# Altium PCB HDMI_Extension_Project.PcbDoc
Units mm, origin at the board's own origin, x right, y up, seen from the top; angles counter-clockwise.
Board outline 90.3 x 85.47 mm, 2 copper layers (Top Layer, Bottom Layer); 61 components, 71 nets, 283 pads, 95 vias.
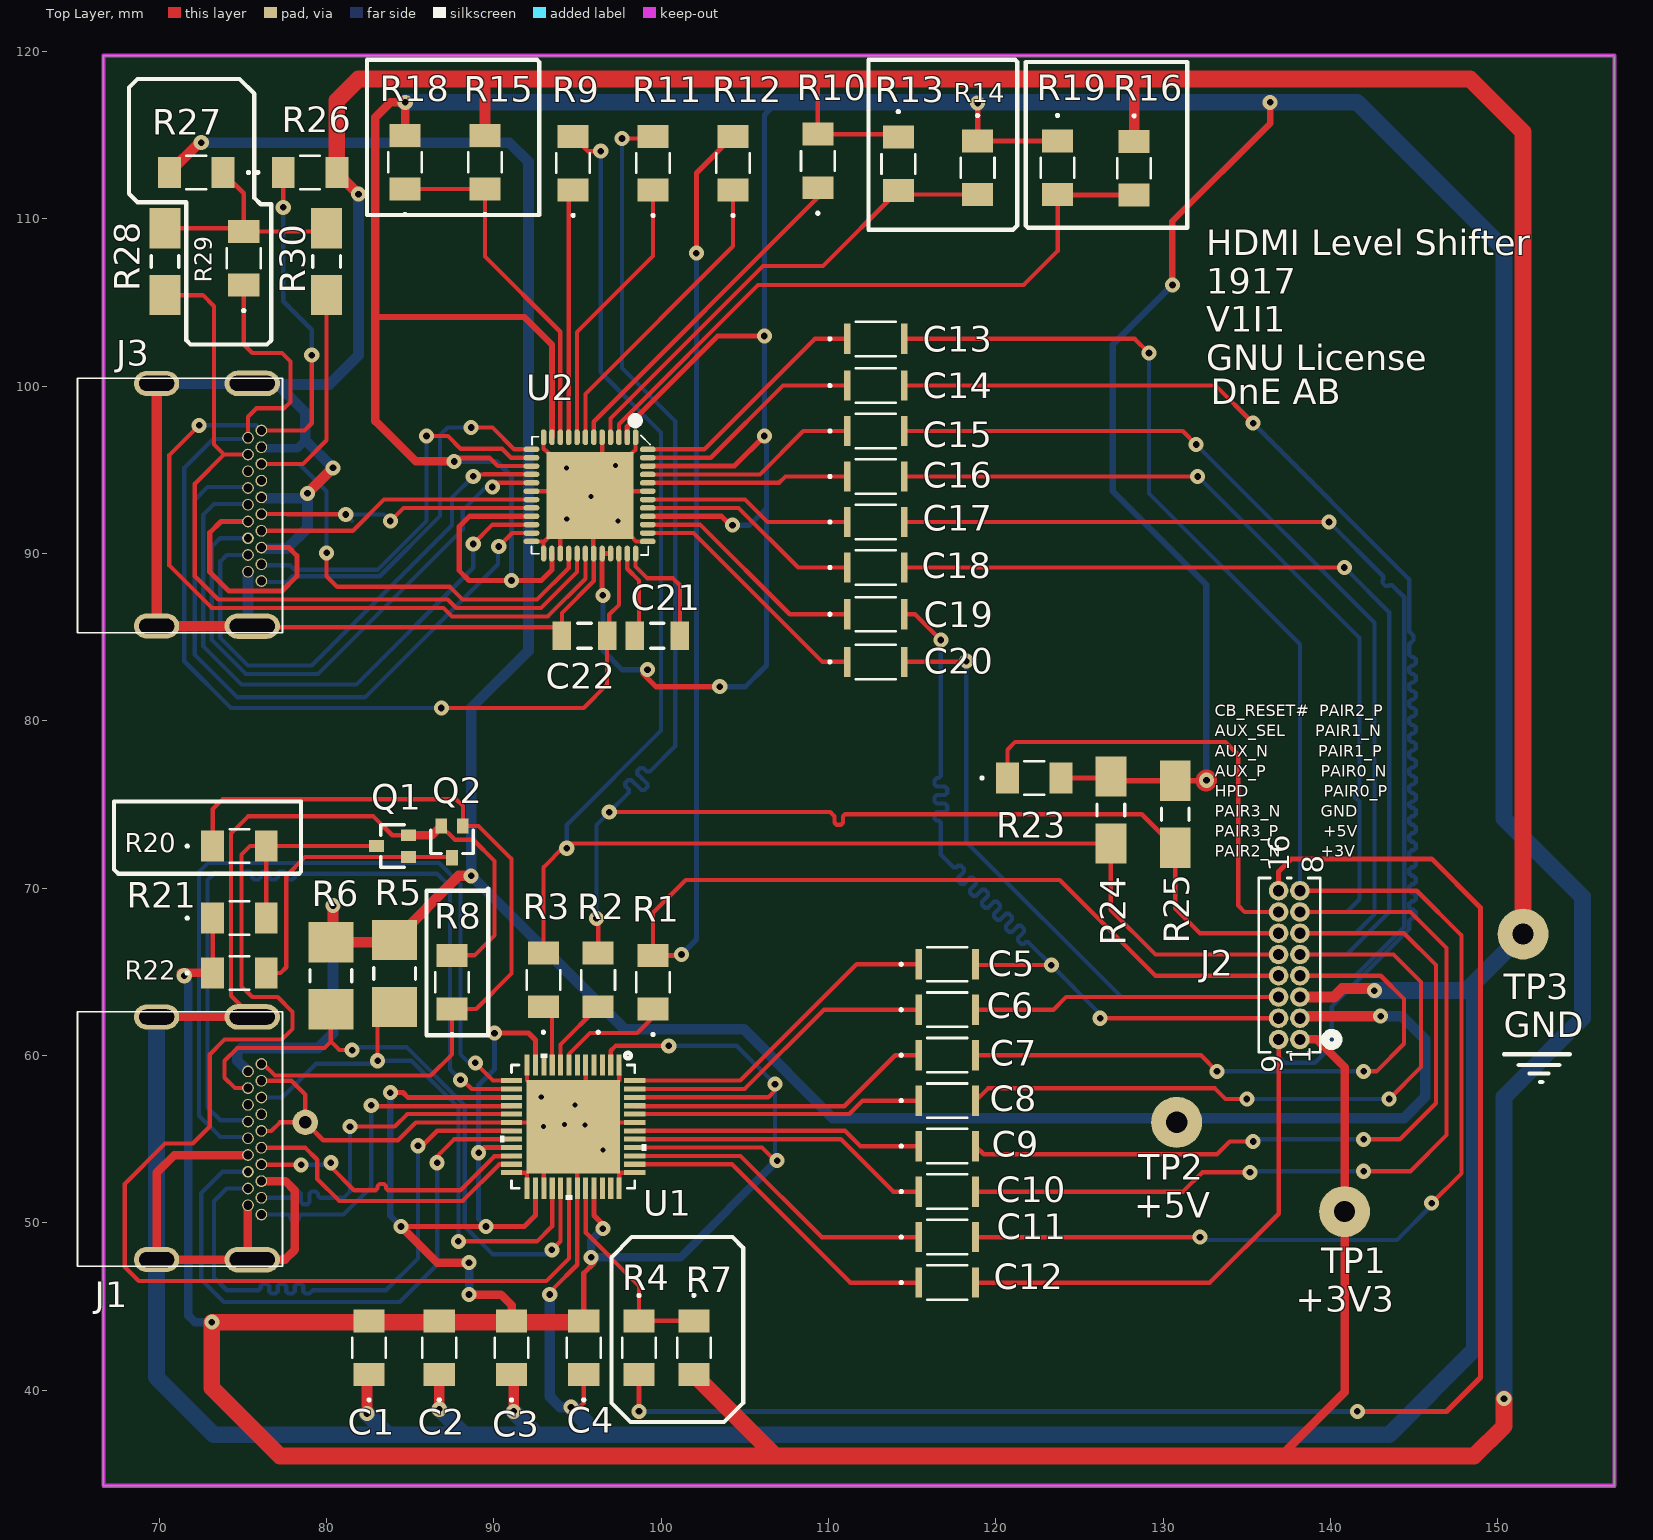
[diagram p0: Top Layer view]
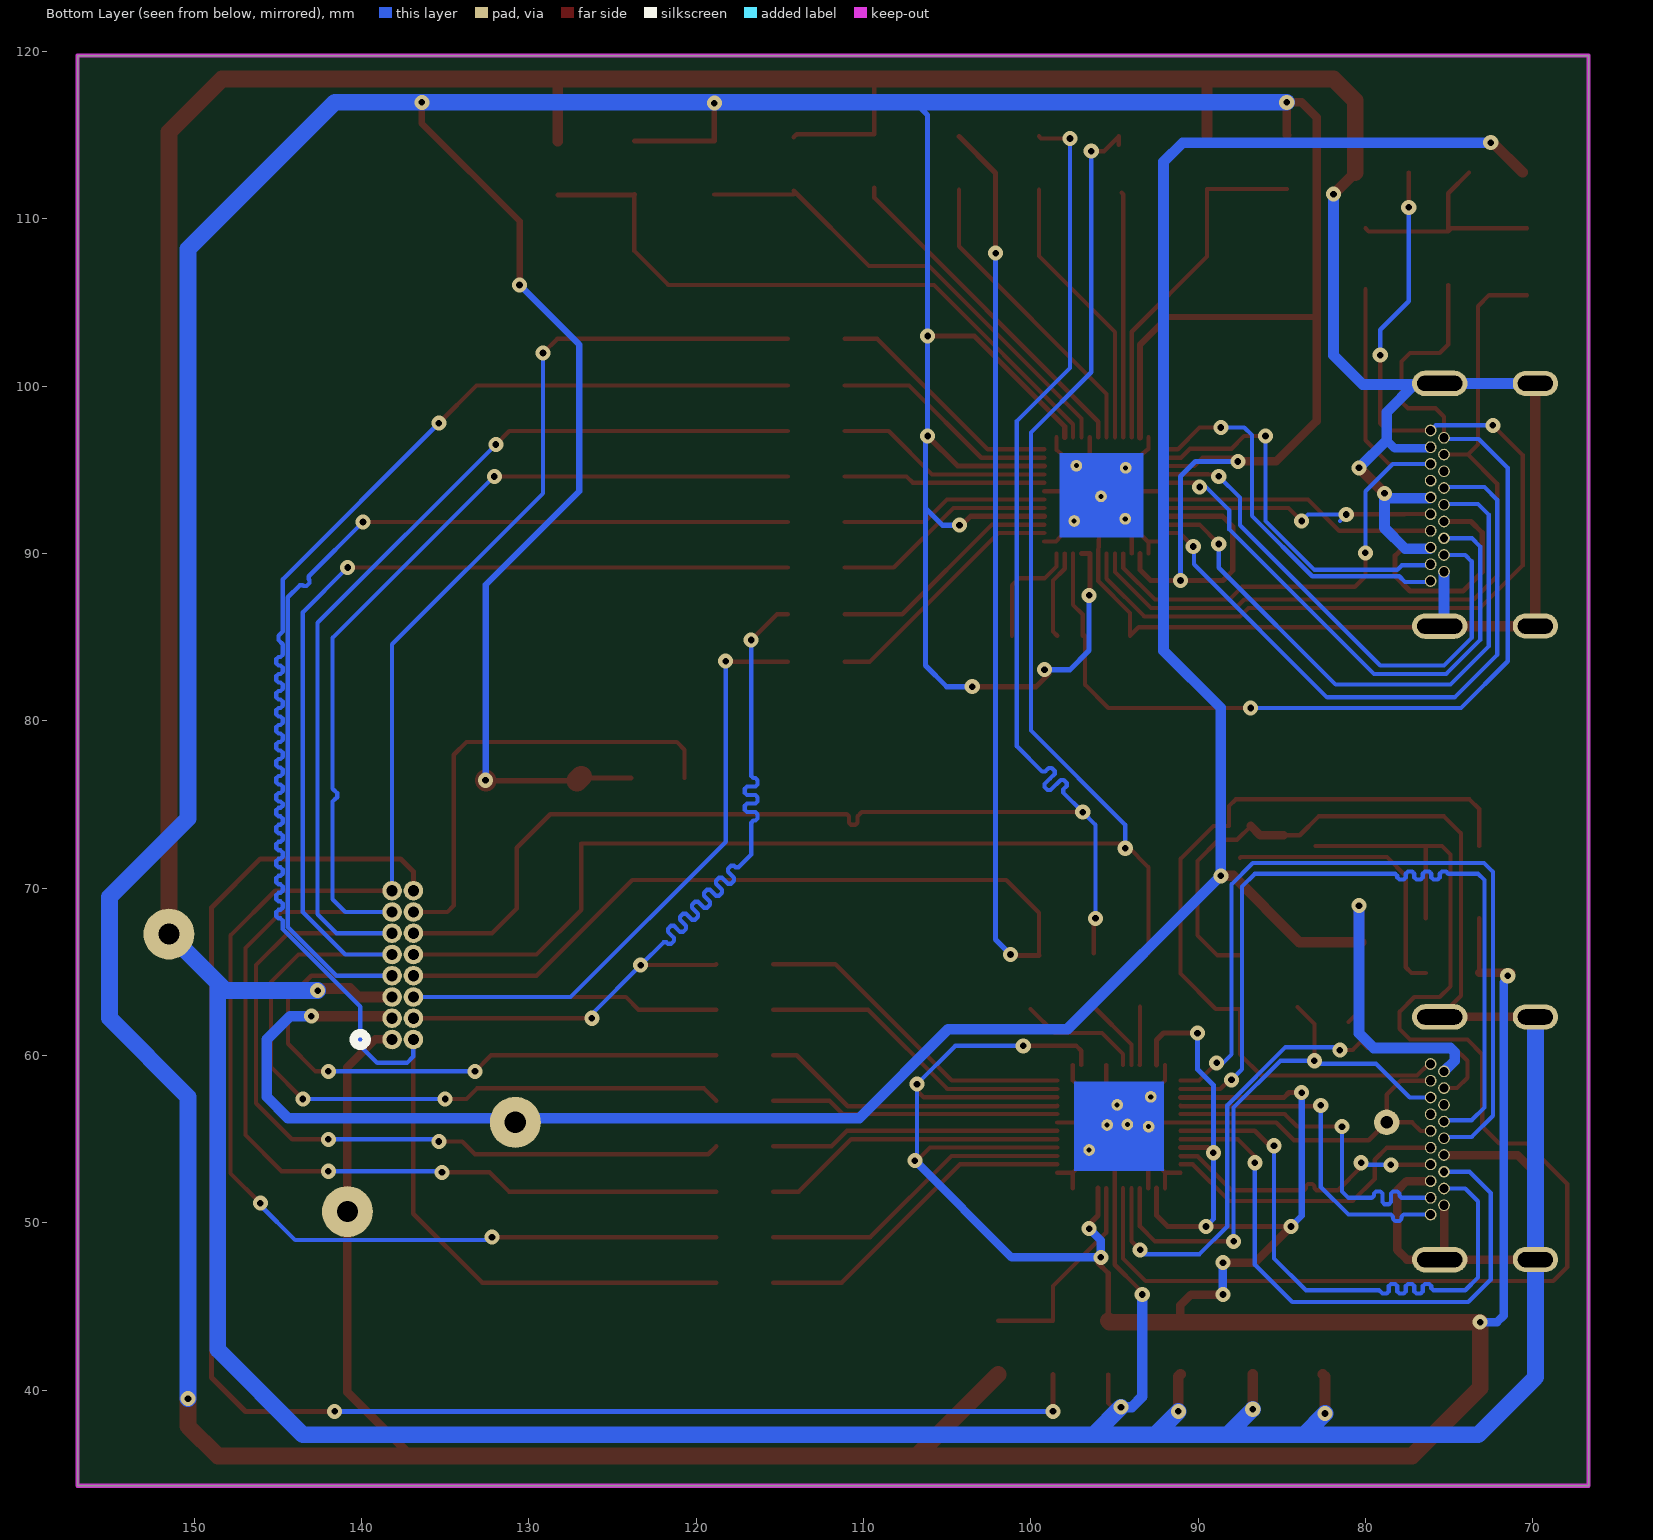
[diagram p1: Bottom Layer view, seen from below]
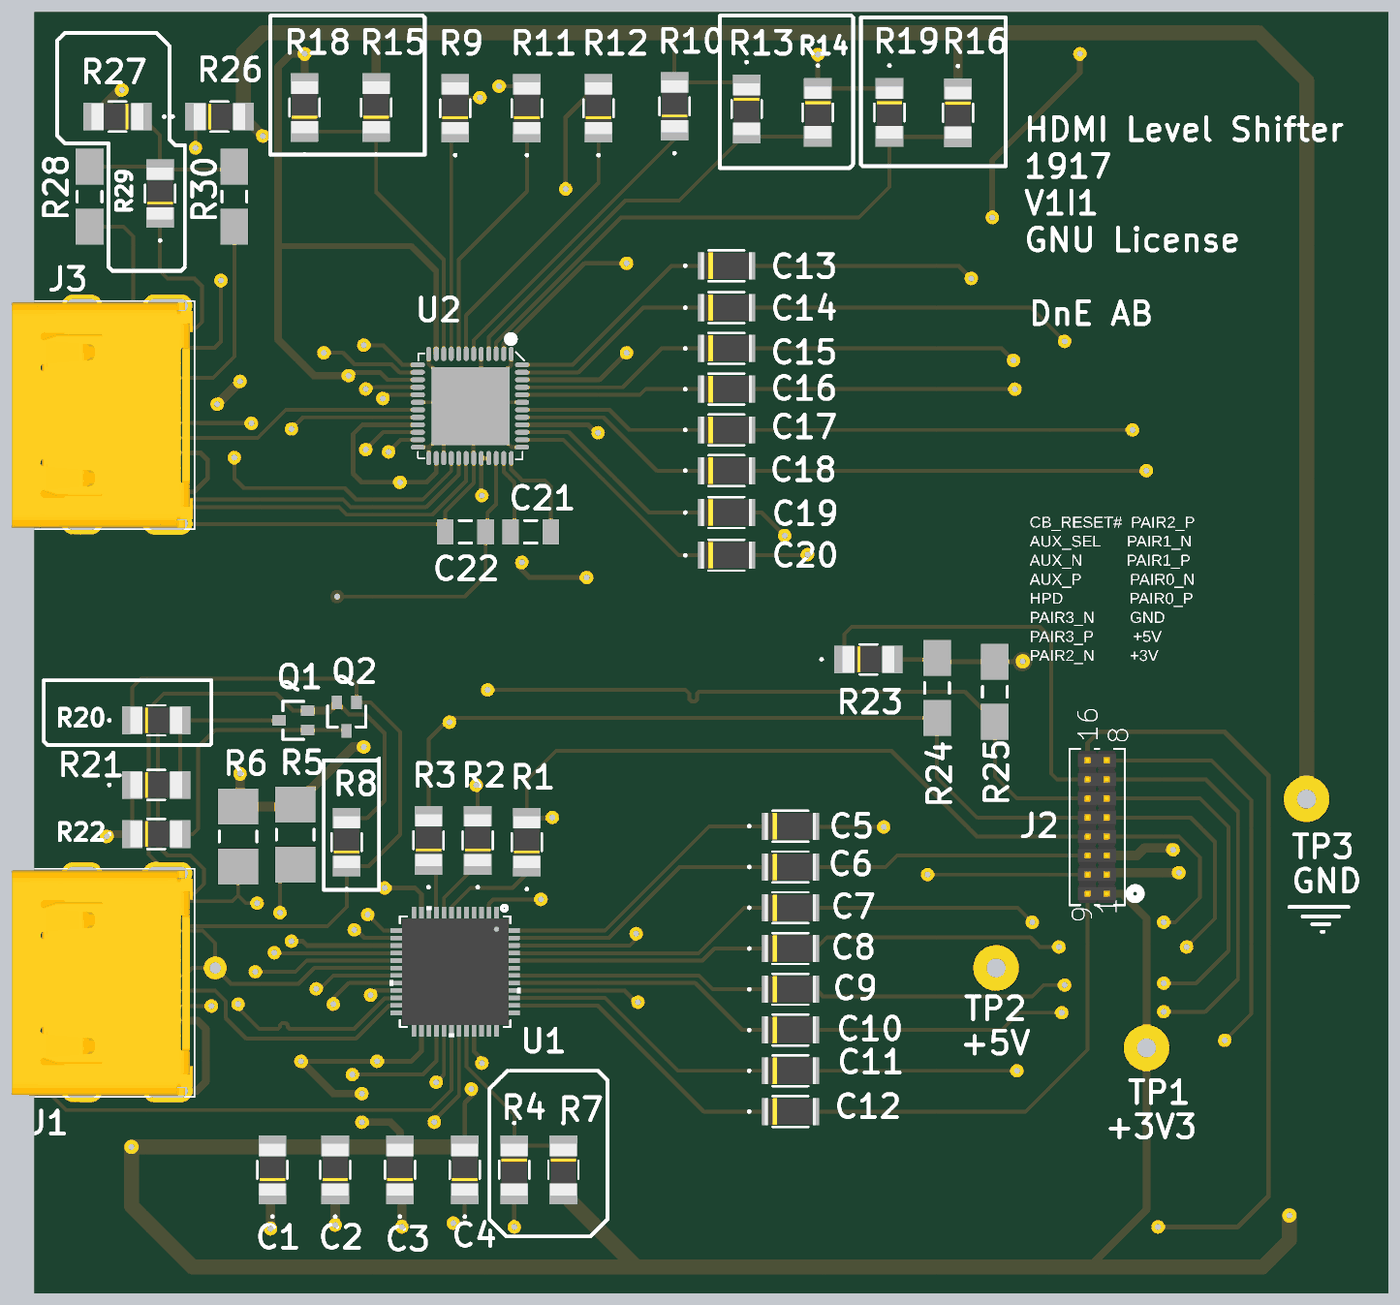
[diagram p2: 3D render of the assembled board from above, using the file's embedded part models]

## Layer stack, top to bottom
Top Solder: solder mask 0.0102, Solder Resist, Dk 3.5
Top Layer: signal copper 0.0356
Dielectric 1: dielectric 0.32, FR-4, Dk 4.8
Bottom Layer: signal copper 0.0356
Bottom Solder: solder mask 0.0102, Solder Resist, Dk 3.5

## Board outline
66.675,34.29 66.675,119.761 156.972,119.761 156.972,34.29

## Design rules (kind name [scope] priority, off if disabled: settings)
Clearance [All] p1: gap=0.051 ignorepadtopadclearanceinfootprint=FALSE
DiffPairsRouting DiffPair_85DiffPairsRouting [InDifferentialPairClass('HDMI')] p1: maxlimit=0.381 minlimit=0.254 mostfreqgap=0.254 toplayer_minwidth=0.254 toplayer_maxwidth=0.381 toplayer_prefwidth=0.254 bottomlayer_minwidth=0.254 bottomlayer_maxwidth=0.381 bottomlayer_prefwidth=0.254 maxuncoupledlength=12.7
DiffPairsRouting DiffPair_DiffPairsRouting [InDifferentialPair ('TMDS_D2')] p2: maxlimit=0.508 minlimit=0.254 mostfreqgap=0.381 toplayer_minwidth=0.254 toplayer_maxwidth=0.381 toplayer_prefwidth=0.381 bottomlayer_minwidth=0.254 bottomlayer_maxwidth=0.381 bottomlayer_prefwidth=0.381 maxuncoupledlength=12.7
DiffPairsRouting [All] p3: maxlimit=0.254 minlimit=0.254 mostfreqgap=0.254 toplayer_minwidth=0.381 toplayer_maxwidth=0.381 toplayer_prefwidth=0.381 bottomlayer_minwidth=0.381 bottomlayer_maxwidth=0.381 bottomlayer_prefwidth=0.381 maxuncoupledlength=12.7
HoleSize [All] p1: absolutevalues=TRUE maxlimit=3.81 minlimit=0.025 maxpercent=80.000 minpercent=20.000
HoleToHoleClearance [All] p1: gap=0.025 allowstackedmicrovias=TRUE
MatchedLengths DiffPair_85MatchedLengths [InDifferentialPairClass('HDMI')] p1: tolerance=0.127 checknetsindiffpair=TRUE checkdiffpairvsdiffpair=FALSE checkxsignals=FALSE checkothers=FALSE
MinimumSolderMaskSliver [All] p1: minsoldermaskwidth=0.025
PolygonConnect [All] p1: connectstyle=Relief reliefconductorwidth=0.254 reliefentries=4 polygonreliefangle="90 Angle" airgapwidth=0.254
RoutingVias [All] p1: holewidth=0.4 width=0.9 viastyle="Through Hole" minholewidth=0.3 minwidth=0.7 maxholewidth=1 maxwidth=2
SilkToSilkClearance [All] p1: silktosilkclearance=0.025
SilkToSolderMaskClearance [IsPad] p1: minsilkscreentomaskgap=0 clearancetoexposedcopper=TRUE
SolderMaskExpansion [All] p1: expansion=0.025
Width [All] p1: maxlimit=1.27 minlimit=0.254 preferedwidth=0.254
24 further rules are at their usual default settings.

## Classes and differential pairs
net class DIFF_85: DDI0_AUX_N DDI0_AUX_P DDI0_PAIR0_N DDI0_PAIR0_P DDI0_PAIR1_N DDI0_PAIR1_P DDI0_PAIR2_N DDI0_PAIR2_P DDI0_PAIR3_N DDI0_PAIR3_P TMDS_CLK_N TMDS_CLK_P TMDS_D0_N TMDS_D0_P TMDS_D1_N TMDS_D1_P TMDS_D2_N TMDS_D2_P
differential pair class HDMI: DDI0_AUX DDI0_PAIR0 DDI0_PAIR1 DDI0_PAIR2 DDI0_PAIR3 TMDS_CLK TMDS_D0 TMDS_D1 TMDS_D2
differential pair TMDS_D2: +TMDS_D2_P -TMDS_D2_N
differential pair TMDS_D1: +TMDS_D1_P -TMDS_D1_N
differential pair TMDS_CLK: +TMDS_CLK_P -TMDS_CLK_N
differential pair TMDS_D0: +TMDS_D0_P -TMDS_D0_N
differential pair DDI0_AUX: +DDI0_AUX_P -DDI0_AUX_N
differential pair DDI0_PAIR0: +DDI0_PAIR0_P -DDI0_PAIR0_N
differential pair DDI0_PAIR1: +DDI0_PAIR1_P -DDI0_PAIR1_N
differential pair DDI0_PAIR2: +DDI0_PAIR2_P -DDI0_PAIR2_N
differential pair DDI0_PAIR3: +DDI0_PAIR3_P -DDI0_PAIR3_N

## Components (designator, comment, footprint, x,y, rotation, side; value= is the part's Value field where it differs from the comment)
C1 "100nF" STA_RMCF1206-M 82.55,42.545 r90 top
C2 "100nF" STA_RMCF1206-M 86.741,42.545 r90 top
C3 "100nF" STA_RMCF1206-M 91.059,42.545 r90 top
C4 "100nF" STA_RMCF1206-M 95.377,42.545 r90 top
C5 "0.1uF" CAP_3216 117.094,65.456 r0 top value=Value
C6 "0.1uF" CAP_3216 117.094,62.738 r0 top value=Value
C7 "0.1uF" CAP_3216 117.094,60.02 r0 top value=Value
C8 "0.1uF" CAP_3216 117.094,57.302 r0 top value=Value
C9 "0.1uF" CAP_3216 117.094,54.584 r0 top value=Value
C10 "0.1uF" CAP_3216 117.094,51.866 r0 top value=Value
C11 "0.1uF" CAP_3216 117.094,49.148 r0 top value=Value
C12 "0.1uF" CAP_3216 117.094,46.43 r0 top value=Value
C13 "0.1uF" CAP_3216 112.827,102.832 r0 top value=Value
C14 "0.1uF" CAP_3216 112.827,100.039 r0 top value=Value
C15 "0.1uF" CAP_3216 112.827,97.321 r0 top value=Value
C16 "0.1uF" CAP_3216 112.827,94.603 r0 top value=Value
C17 "0.1uF" CAP_3216 112.827,91.885 r0 top value=Value
C18 "0.1uF" CAP_3216 112.827,89.167 r0 top value=Value
C19 "0.1uF" CAP_3216 112.827,86.373 r0 top value=Value
C20 "0.1uF" CAP_3216 112.827,83.528 r0 top value=Value
C21 "1000pF" C1206 99.775,85.09 r180 top
C22 "10u" C1206 95.421,85.09 r180 top value=10µF
J1 "HDMI Connector" HDMI_Thru 75.311,55.055 r270 top
J2 "Part Number: FTS-108-01-F-D" CON16_2x8_TU_FTS 136.906,69.85 r90 top value=Value
J3 "HDMI Connector" HDMI_Thru 75.311,92.916 r270 top
Q1 "2N7002BKW,115" SC70_SOT323 83.947,72.517 r180 top
Q2 "2N7002BKW,115" SC70_SOT323 87.503,72.771 r270 top
R1 "0R0" STA_RMCF1206-M 99.518,64.389 r90 top value=Value
R2 "0R0" STA_RMCF1206-M 96.241,64.516 r90 top value=Value
R3 "0R0" STA_RMCF1206-M 92.964,64.516 r90 top value=Value
R4 "0R0" STA_RMCF1206-M 98.679,42.545 r270 top value=Value
R5 "2K2" R1210 84.074,64.897 r270 top
R6 "2K2" R1210 80.264,64.77 r270 top
R7 "0R0" STA_RMCF1206-M 101.956,42.545 r270 top value=Value
R8 "100K" STA_RMCF1206-M 87.503,64.389 r90 top
R9 "0R0" STA_RMCF1206-M 94.742,113.335 r90 top value=Value
R10 "20K" STA_RMCF1206-M 109.363,113.462 r90 top
R11 "0R0" STA_RMCF1206-M 99.52,113.335 r90 top value=Value
R12 "0R0" STA_RMCF1206-M 104.299,113.335 r90 top value=Value
R13 "0R0" STA_RMCF1206-M 114.173,113.284 r270 top value=Value
R14 "0R0" STA_RMCF1206-M 118.92,113.055 r270 top value=Value
R15 "0R0" STA_RMCF1206-M 89.471,113.385 r90 top value=Value
R16 "0R0" STA_RMCF1206-M 128.27,113.03 r270 top value=Value
R18 "0R0" STA_RMCF1206-M 84.693,113.385 r90 top value=Value
R19 "0R0" STA_RMCF1206-M 123.698,113.055 r270 top value=Value
R20 "0R0" STA_RMCF1206-M 74.803,72.517 r0 top value=Value
R21 "4K7" STA_RMCF1206-M 74.803,68.211 r0 top value=Value
R22 "4K7" STA_RMCF1206-M 74.803,64.934 r0 top value=Value
R23 "100K" STA_RMCF1206-M 122.297,76.581 r0 top
R24 "2K2" R1206 126.873,74.676 r270 top
R25 "2K2" R1206 130.725,74.422 r270 top
R26 "100K" STA_RMCF1206-M 79.02,112.776 r0 top
R27 "0R0" STA_RMCF1206-M 72.212,112.776 r180 top value=Value
R28 "2K2" R1206 70.358,107.442 r270 top
R29 "0R0" STA_RMCF1206-M 75.057,107.645 r90 top value=Value
R30 "2K2" R1206 80.01,107.442 r270 top
TP1 "TP_25MILC" TP_25C 140.843,50.723 r0 top
TP2 "TP_25MILC" TP_25C 130.81,56.057 r0 top
TP3 "TP_25MILC" TP_25C 151.511,67.31 r0 top
U1 "MAX9406ETM+" 21-0144H_T4877-6 94.742,55.753 r270 top
U2 "Interface - Specialized ENHNCD PERFORMANCE HDMI/DVI SHFTR V-REG" HVQFN48 98.476,96.952 r270 top

## Footprints (in the part's own frame and the unit in brackets; to place one, negate y for a bottom-side part, rotate by r counter-clockwise, add the part's x,y. Pads: shape width x height; smd on the part's side, far side on the other; paste and mask are expansions set on the pad)
21-0144H_T4877-6 [mil]
  rect 50x12 smd paste+0 mask+0: 1(-145,108.27) 2(-145,88.58) 3(-145,68.9) 4(-145,49.21) 5(-145,29.53) 6(-145,9.84) 7(-145,-9.84) 8(-145,-29.53) 9(-145,-49.21) 10(-145,-68.9) 11(-145,-88.58) 12(-145,-108.27) 25(145,-108.27) 26(145,-88.58) 27(145,-68.9) 28(145,-49.21) 29(145,-29.53) 30(145,-9.84) 31(145,9.84) 32(145,29.53) 33(145,49.21) 34(145,68.9) 35(145,88.58) 36(145,108.27)
  rect 12x50 smd paste+0 mask+0: 13(-108.27,-145) 14(-88.58,-145) 15(-68.9,-145) 16(-49.21,-145) 17(-29.53,-145) 18(-9.84,-145) 19(9.84,-145) 20(29.53,-145) 21(49.21,-145) 22(68.9,-145) 23(88.58,-145) 24(108.27,-145) 37(108.27,145) 38(88.58,145) 39(68.9,145) 40(49.21,145) 41(29.53,145) 42(9.84,145) 43(-9.84,145) 44(-29.53,145) 45(-49.21,145) 46(-68.9,145) 47(-88.58,145) 48(-108.27,145)
  rect 220x220 smd paste-109.5 mask+0: 49(0,0)
  silkscreen extent -174,-172 172,172, body extent -140,-140 140,140, height 32
C1206 [mm] "Chip Capacitor, Body 3.2x1.6mm, IPC High Density"
  rect 1.1x1.7 smd: 1(-1.35,0) 2(1.35,0)
  silkscreen extent -0.4,-0.75 0.4,0.75, body extent -1.7,-0.9 1.7,0.9, height 1.3
CAP_3216 [mil]
  rect 16x71 smd paste+0 mask+0: 1(-67,0) 2(67,0)
  silkscreen extent -111,-40 47,40, body extent -67,-36 67,36, height 49
CON16_2x8_TU_FTS [mil]
  round 46 hole 26: 1(-350,-50) 2(-300,-50) 3(-250,-50) 4(-200,-50) 5(-150,-50) 6(-100,-50) 7(-50,-50) 8(0,-50) 9(-350,0) 10(-300,0) 11(-250,0) 12(-200,0) 13(-150,0) 14(-100,0) 15(-50,0) 16(0,0)
  silkscreen extent -380,-140 30,47, body extent -375,-75 25,25, height 154
HDMI_Thru [mm]
  round 0.7 hole 0.55: 1(4.559,0.8) 2(4,0) 3(3.559,0.8) 4(3,0) 5(2.559,0.8) 7(1.559,0.8) 8(1,0) 9(0.559,0.8) 10(0,0) 11(-0.441,0.8) 12(-1,0) 13(-1.441,0.8) 14(-2,0) 15(-2.441,0.8) 16(-3,0) 17(-3.441,0.8) 18(-4,0) 19(-4.441,0.8)
  round 0.7 hole 0.5: 6(2,0)
  oval 1.524x3.302 hole 0.9 slot 2.7 at 90 deg: H1(7.25,0.254) H2(-7.25,0.254)
  oval 1.5x2.7 hole 0.9 slot 2.1 at 90 deg: H3(7.25,-5.461) H4(-7.25,-5.461)
  silkscreen extent -7.57,-10.19 7.65,2.06, body extent -7.45,-10.12 7.55,1.93, height 6.08
HVQFN48 [mm]
  oval 0.95x0.33 smd: 1(0,0) 2(0,-0.5) 3(0,-1) 4(0,-1.5) 5(0,-2) 6(0,-2.5) 7(0,-3) 8(0,-3.5) 9(0,-4) 10(0,-4.5) 11(0,-5) 12(0,-5.5) 25(6.95,-5.5) 26(6.95,-5) 27(6.95,-4.5) 28(6.95,-4) 29(6.95,-3.5) 30(6.95,-3) 31(6.95,-2.5) 32(6.95,-2) 33(6.95,-1.5) 34(6.95,-1) 35(6.95,-0.5) 36(6.95,0)
  oval 0.33x0.95 smd: 13(0.725,-6.225) 14(1.225,-6.225) 15(1.725,-6.225) 16(2.225,-6.225) 17(2.725,-6.225) 18(3.225,-6.225) 19(3.725,-6.225) 20(4.225,-6.225) 21(4.725,-6.225) 22(5.225,-6.225) 23(5.725,-6.225) 24(6.225,-6.225) 37(6.225,0.725) 38(5.725,0.725) 39(5.225,0.725) 40(4.725,0.725) 41(4.225,0.725) 42(3.725,0.725) 43(3.225,0.725) 44(2.725,0.725) 45(2.225,0.725) 46(1.725,0.725) 47(1.225,0.725) 48(0.725,0.725)
  rect 5.2x5.2 smd: 49(3.48,-2.718)
  silkscreen extent -1.2,-6.22 7.04,0.86, body extent 0,-6.22 6.96,0.76, height 0.85
R1206 [mm]
  rect 2.4x1.85 smd: 1(-2,0) 2(2,0)
  silkscreen extent -0.35,-0.82 0.35,0.82, body extent -1.75,-0.91 1.75,0.91, height 0.7
R1210 [mm]
  rect 2.4x2.7 smd: 1(-2,0) 2(2,0)
  silkscreen extent -0.35,-1.25 0.35,1.25, body extent -1.75,-1.33 1.75,1.32, height 0.7
SC70_SOT323 [mm]
  rect 0.9x0.7 smd: 1(-0.95,0.65) 2(-0.95,-0.65) 3(0.95,0)
  silkscreen extent -0.7,-1.27 0.7,1.27, body extent -1.27,-1.27 1.27,1.27, height 1.1
STA_RMCF1206-M [mil]
  rect 54x73 smd paste+0 mask+0: 1(-63,0) 2(63,0)
  silkscreen extent -126,-40 23,40, body extent -68,-34 68,34, height 28
TP_25C [mil]
  round 120 hole 50 paste-25 mask+2: 1(0,-1.97)

## Part data
C1 C2 C3 C4: library part CL05A104KA5NNNC, "CAP CER 0.1UF 50V X8R 0603", Manufacturer 1="Samsung Electro-Mechanics", Operating Temperature="-55°C ~ 85°C", Package / Case="0402 (1005 Metric)", Ratings=-, Supplier Part Number 1=1276-1043-6-ND, Temperature Coefficient=X5R, Tolerance=±10%, Voltage - Rated=25V, Applications="General Purpose", Category=Capacitors, ComponentLink1Description=http://www.samsungsem.com/kr/support/product-search/mlcc/CL05A104KA5NNNC.jsp, ComponentLink1URL=http://www.samsungsem.com/kr/support/product-search/mlcc/CL05A104KA5NNNC.jsp, Description 1="CAP CER 0.1UF 25V X5R 0402", Features=-, Height - Seated (Max)=-, Lead Spacing=-, Lead Style=-, Manufacturer Part Number 1=CL05A104KA5NNNC, Mounting Type="Surface Mount, MLCC", Notification="Current market demand for these product types have resulted in fluctuating and extending lead times. Lead times may differ.", Packaging=Digi-Reel®, Part Status=Active, Pricing 1="1=0.1, 10=0.04, 100=0.0176, 500=0.0126, 1000=0.0099, 2500=0.009, 5000=0.00828 (USD)", RoHS="RoHS Compliant", Size / Dimension="0.039\" L x 0.020\" W (1.00mm x 0.50mm)", Stock 1=100000, Supplier 1=Digi-Key, Thickness (Max)="0.022\" (0.55mm)"
C5 C6 C7 C8 C9 C10 C11 C12 C13 C14 C15 C16 C17 C18 C19 C20: library part C3216X8R2A104K11, "CAP CER 0.1UF 100V X8R 1206", Manufacturer_Part_Number=C3216X8R2A104K115AA, Built_By=EMA_UL_Team, Copyright="Copyright (C) 2018 Accelerated Designs. All rights reserved", RefDes=RefDes, Type=DEV, Vendor=TDK
C21: library part C1206X102KGRACAUTO, "CAP CER 1206 1NF 2000V X7R 10% F", Manufacturer 1=KEMET, Operating Temperature="-55°C ~ 125°C", Package / Case="1206 (3216 Metric)", Ratings=AEC-Q200, Supplier Part Number 1=399-16730-1-ND, Temperature Coefficient=X7R, Tolerance=±10%, Voltage - Rated="2000V (2kV)", Applications="Automotive, Boardflex Sensitive", Category=Capacitors, ComponentLink1Description=https://api.kemet.com/component-edge/download/datasheet/C1206X102KGRACAUTO.pdf, ComponentLink1URL=https://api.kemet.com/component-edge/download/datasheet/C1206X102KGRACAUTO.pdf, Description 1="CAP CER 1206 1NF 2000V X7R 10% F", Failure Rate=-, Features="Low ESL, Soft Termination, High Voltage", Height - Seated (Max)=-, Lead Spacing=-, Lead Style=-, Manufacturer Part Number 1=C1206X102KGRACAUTO, Mounting Type="Surface Mount, MLCC", Packaging="Cut Tape (CT)", Part Status=Active, Pricing 1="1=0.79, 10=0.58, 100=0.3974, 500=0.31464, 1000=0.26496 (USD)", RoHS="RoHS Compliant", Size / Dimension="0.130\" L x 0.063\" W (3.30mm x 1.60mm)", Stock 1=7503, Supplier 1=Digi-Key, Thickness (Max)="0.073\" (1.85mm)"
C22: library part C1608X5R0J106M, "CAP CER 10UF 6.3V X5R 20% 0603", Capacitance=10µF, Manufacturer="TDK Corporation", Operating Temperature="-55°C ~ 85°C", Package / Case="0603 (1608 Metric)", Ratings=-, Supplier Part Number=445-4112-1-ND, Temperature Coefficient=X5R, Tolerance=±20%, Voltage - Rated=6.3V, .Checked PCB=used, .Checked SCH=used, Applications="General Purpose", Category=Capacitors, ComponentLink1Description=http://www.tdk.com/pdf/general_B11.pdf, ComponentLink1URL=http://www.tdk.com/pdf/general_B11.pdf, Features="Low ESR", Height - Seated (Max)=-, Lead Spacing=-, Lead Style=-, Manufacturer Part Number=C1608X5R0J106M, Mounting Type="Surface Mount, MLCC", Packaging="Cut Tape (CT)", Price 1k [$]=0.08580, Pricing 1="1=0.46, 10=0.363, 100=0.1898, 250=0.14024, 500=0.1089, 1000=0.0858 (USD)", RoHS="RoHS Compliant", Size / Dimension="0.063\" L x 0.031\" W (1.60mm x 0.80mm)", Stock 1=48157, Supplier=Digikey, Supplier 1=Digi-Key, Supplier Part Number 1=445-4112-1-ND, Thickness (Max)="0.037\" (0.95mm)"
J1 J3: library part HDMI_Connector
J2: library part FTS-108-01-F-D, "No Description Available", Built_By=EMA_UL_Team, Copyright="Copyright (C) 2018 Accelerated Designs. All rights reserved", Manufacturer_Part_Number=FTS-108-01-F-D, RefDes=RefDes, Type=DEV, Vendor="Samtec Inc"
Q1 Q2: "MOSFET N-CH 60V 310MA SOT323", Current - Continuous Drain (Id) @ 25° C=310mA, Drain to Source Voltage (Vdss)=60V, Input Capacitance (Ciss) @ Vds="50pF @ 10V", Manufacturer="NXP Semiconductors", Package / Case="SC-70, SOT-323", Power - Max=275mW, Supplier Device Package=SC-70, Supplier Part Number 1=568-5980-1-ND, .Checked PCB=RF, .Checked SCH=RF, Category="Discrete Semiconductor Products", ComponentLink1Description=http://www.nxp.com/documents/data_sheet/2N7002BKW.pdf, ComponentLink1URL=http://www.nxp.com/documents/data_sheet/2N7002BKW.pdf, FET Feature="Logic Level Gate", FET Type="MOSFET N-Channel, Metal Oxide", Gate Charge (Qg) @ Vgs="0.6nC @ 4.5V", Manufacturer Part Number=2N7002BKW,115, Mounting Type="Surface Mount", Packaging="Cut Tape (CT)", Pricing 1="1=0.39, 10=0.354, 25=0.2548, 100=0.1983, 250=0.12456, 500=0.10616, 1000=0.07233 (USD)", Rds On (Max) @ Id, Vgs="1.6 Ohm @ 500mA, 10V", RoHS="RoHS Compliant", Stock 1=15666, Supplier 1=Digi-Key, Vgs(th) (Max) @ Id="2.1V @ 250µA"
R1 R2 R3 R4 R7 R9 R11 R12 R13 R14 R15 R16 R18 R19 R20 R27 R29: library part RMCF1206JT390R, "No Description Available", Manufacturer 1=Stackpole-Electronics-Inc., Operating Temperature="-55°C ~ 155°C", Package / Case="1206 (3216 Metric)", Power (Watts)="0.25W, 1/4W", Resistance (Ohms)=390, Supplier Device Package=1206, Supplier Part Number 1=RMCF1206JT390R-REEL, Temperature Coefficient=±200ppm/°C, Tolerance=±5%, Built_By=EMA_UL_Team, Category=Resistors, Composition="Thick Film", Copyright="Copyright (C) 2018 Accelerated Designs. All rights reserved", Family="Chip Resistor - Surface Mount", Features="Automotive AEC-Q200", Height="0.028\" (0.70mm)", Manufacturer_Part_Number=RMCF1206JT390R, Manufacturer Part Number 1=RMCF1206JT390R, Number of Terminations=2, Packaging=Digi-Reel®, Pricing 1="5000=0.004, 25000=0.0038, 50000=0.0035, 125000=0.0031, 250000=0.0028 (USD)", RefDes=RefDes, Series=RMCF, Size / Dimension="0.126\" L x 0.063\" W (3.20mm x 1.60mm)", Stock 1=15000, Supplier 1="Future Electronics", Type=DEV, Vendor="Stackpole International"
R5 R6: library part RC1005F222CS, "RES.(3225) 1210 2.2K Ohms 1% 1/3W-S 100PPM", Package / Case=1210, Tolerance=±1%
R8 R23: library part RC2012F104CS, "RES.(3216) 1206 100K Ohms 1% 1/4W-S 100PPM", Package / Case=1206, Tolerance=±1%
R10: library part RC2012F203CS, "RES.(3216) 1206 20K Ohms 1% 1/4W-S 100PPM", Supplier Device Package=1206, Tolerance=±1%
R21 R22: library part CRG0805F4K7, "RES SMD 4.7K OHM 1% 1/8W 0805", Manufacturer 1="TE Connectivity Passive Product", Operating Temperature="-55°C ~ 125°C", Package / Case="0805 (2012 Metric)", Power (Watts)="0.125W, 1/8W", Supplier Device Package=0805, Supplier Part Number 1=A106065CT-ND, Temperature Coefficient=±100ppm/°C, Tolerance=±1%, Built_By=EMA_UL_Team, C="Copyright (C) 2015 Accelerated Designs. All rights reserved", Category=Resistors, ComponentLink1Description=http://www.te.com/commerce/DocumentDelivery/DDEController?Action=srchrtrv&DocNm=1773204&DocType=DS&DocLang=English, ComponentLink1URL=http://www.te.com/commerce/DocumentDelivery/DDEController?Action=srchrtrv&DocNm=1773204&DocType=DS&DocLang=English, Composition="Thick Film", Description 1="RES SMD 4.7K OHM 1% 1/8W 0805", Failure Rate=-, Features=-, Height - Seated (Max)="0.026\" (0.65mm)", Manufacturer_Part_Number=CRG0805F4K7, Manufacturer Part Number 1=CRG0805F4K7, Packaging="Cut Tape (CT)", Part Status=Active, Pricing 1="1=0.1, 10=0.035, 100=0.0143, 1000=0.00641, 2500=0.00557 (USD)", RefDes=RefDes, RoHS="RoHS Compliant", Size / Dimension="0.079\" L x 0.049\" W (2.00mm x 1.25mm)", Stock 1=28633, Supplier 1=Digi-Key, Type=DEV, Vendor="TE Connectivity"
R24 R25: library part RC1005F222CS, "RES.(3216) 1206 2.2K Ohms 1% 1/4W-S 100PPM", Package / Case=1206, Tolerance=±1%
R26: library part RC2012F104CS, "RES.(3216) 1206 100K Ohms 1% 1/4W-S 100PPM", Supplier Device Package=1206, Tolerance=±1%
R28 R30: library part RC1005F222CS, "RES.(3216) 1206 2.2K Ohms 1% 1/4W-S 100PPM", Supplier Device Package=1206, Tolerance=±1%
TP1 TP2 TP3: "Test Point 25mil"
U1: "IC DVI/HDMI LVL SHIFTR 48TQFN", Base Part Number=MAX9406, Manufacturer 1="Maxim Integrated", Package / Case="48-WFQFN Exposed Pad", Supplier Device Package="48-TQFN (7x7)", Supplier Part Number 1=MAX9406ETM+-ND, Applications="Base Stations", Category="Integrated Circuits (ICs)", ComponentLink1Description=https://datasheets.maximintegrated.com/en/ds/MAX9406.pdf, ComponentLink1URL=https://datasheets.maximintegrated.com/en/ds/MAX9406.pdf, Description 1="IC DVI/HDMI LVL SHIFTR 48TQFN", Manufacturer Part Number 1=MAX9406ETM+, Mounting Type="Surface Mount", Packaging=Tube, Part Status=Active, Pricing 1="1=3.75, 10=3.563, 25=2.94, 50=2.793, 250=2.70752, 500=2.44832 (USD)", RoHS="RoHS Compliant", Stock 1=162, Supplier 1=Digi-Key, Type="Level Shifter"
U2: library part PTN3381B, Manufacturer 1=NXP, Manufacturer Part Number 1=PTN3381BBS,518, Supplier Part Number 1=771-PTN3381BBS518, Brand="NXP Semiconductors", Category="Interface - Specialized", ComponentLink1Description=https://www.mouser.com/datasheet/2/302/PTN3381B-1127737.pdf, ComponentLink1URL=https://www.mouser.com/datasheet/2/302/PTN3381B-1127737.pdf, Description 1="Interface - Specialized ENHNCD PERFORMANCE HDMI/DVI SHFTR V-REG", Minimum Order Quantity=1, Packaging="Cut Tape", Pricing 1="1=1.94, 10=1.65, 100=1.32, 500=1.15, 1000=0.952, 4000=0.854, 8000=0.821 (USD)", Product Type="Interface - Specialized", Reeling=True, RoHS="RoHS Compliant", RoHS - Mouser=Y, Standard Pack Qty=4000, Stock 1=2570, Subcategory="Interface ICs", Supplier 1=Mouser

## Free pads (board coordinates)
  round 1.524 hole 0.762: 2(78.74,56.007)
  round 0.7 hole 0.3: 3(94.335,95.123) 4(97.409,91.948) 5(97.282,95.25) 6(94.361,92.075) 7(95.812,93.418) 9(92.837,57.531) 10(94.842,57.05) 11(94.234,55.88) 12(92.964,55.753) 13(96.52,54.356) 14(95.441,55.853)

## Via types
v1: diameter 0.9, hole 0.4, Top Layer to Bottom Layer, 94 vias
v2: diameter 0.9, hole 0.4, Top Layer to Bottom Layer, tented both sides, 1 vias

## Nets (pads, with @x,y where several pads share a name; then routed paths per layer and width w, separated by ;. In a path a pad name is that pad's centre, name@x,y a point inside that pad or via, vN(x,y) a via of type N, cw(c..) or ccw(c..) an arc to the next point about the centre after c; other vN are vias at no path point)
+3V3: C1.2 C2.2 C3.2 C4.2 J2.1 R7.2 R14.1 R18.2 R19.1 R21.1 R22.1 R23.2 R24.1 R25.1 TP1.1 U1.2 U1.11 U1.15 U1.21 U1.26 U1.33 U1.40 U1.46 U2.2 U2.11 U2.15 U2.21 U2.26 U2.32 U2.33 U2.40 U2.46 | length 651.4
  Top Layer w0.254: v1@71.284,64.934 71.448,64.77 v1(71.501,64.77) ; R22.1 R21.1 ; 89.755,95.707 90.236,95.227 U2.15 ; U1.2 96.992,60.289 97.282,60.579 v1(100.457,60.579) ; U1.40 106.025,54.503 106.807,53.721 v1(106.934,53.721) ; U1.46 106.398,57.503 106.807,57.912 v1(106.807,58.293)
  Top Layer w0.305: v1(83.82,57.785) 84.582,57.785 84.864,57.503 U1.15 ; v1(84.455,49.784) v1(89.535,49.784) 91.821,49.784 92.492,50.455 U1.26 ; v1(87.63,95.504) 87.833,95.707 89.755,95.707 ; 89.428,54.503 U1.21 ; v1(90.043,61.341) 92.075,61.341 92.492,60.924 U1.11 ; U2.21 88.544,92.227 87.935,91.618 87.935,88.976 88.519,88.392 v1(91.059,88.392) 92.837,88.392 93.476,89.031 U2.26 ; C4.2 95.377,46.99 95.992,47.605 95.992,47.766 v1(95.818,47.939) ; U1.33 95.992,50.439 96.774,49.657 v1(96.52,49.657) ; v1(96.52,87.503) 96.476,87.547 U2.32 U2.33 ; U2.2 97.976,97.595 103.378,102.997 v1(106.172,102.997) ; v1(99.187,83.058) 98.933,82.804 99.695,82.042 v1(103.505,82.042) ; U2.40 103.607,92.227 104.14,91.694 v1(104.267,91.694) ; U2.46 104.371,95.227 v1(106.172,97.028) ; v1(118.92,116.919) R14.1 R19.1 ; R23.2 R24.1@126.778,76.581 ; R24.1@127.127,76.422 R25.1 v1@132.556,76.422
  Top Layer w0.381: 82.931,104.14 91.821,104.14 93.476,102.485 U2.11 ; v1(130.556,106.045) 130.556,109.855 136.398,115.697 v1(136.398,116.967)
  Top Layer w0.508: v1@71.284,64.934 R22.1 ; 77.47,44.069 77.546,44.145 C1.2 C2.2 C3.2 91.059,45.085 90.424,45.72 v1(88.519,45.72) ; v1(84.455,49.784) 86.614,47.625 v1(88.519,47.625) ; R18.2 84.709,115.002 v1(84.709,116.967) 83.82,116.967 82.931,116.078 82.931,104.14 82.931,97.917 85.344,95.504 v1(87.63,95.504) ; 137.033,36.068 140.843,39.878 TP1.1 140.843,59.309 139.192,60.96 J2.1
  Top Layer w0.635: R24.1@126.778,76.581 R24.1
  Top Layer w1: C4.2 95.301,44.069 77.47,44.069 v1(73.152,44.069) 73.152,40.132 77.216,36.068 106.833,36.068 ; R7.2 106.833,36.068 ; v1(150.368,39.497) 150.368,37.846 148.59,36.068 137.033,36.068 106.833,36.068
  Top Layer w1.27: R24.1 R24.1@127.127,76.422 ; v1@132.556,76.422 v1(132.588,76.454)
  Bottom Layer w0.254: v1@71.501,64.643 v1(71.501,64.77) ; v1(100.457,60.579) 104.521,60.579 v1(106.807,58.293) 106.807,53.848 v1(106.934,53.721)
  Bottom Layer w0.305: v1(87.63,95.504) 90.17,95.504 91.059,94.615 v1(91.059,88.392) ; v1(89.535,49.784) 89.096,50.223 v1(89.096,54.19) 89.096,58.235 90.043,59.182 v1(90.043,61.341) ; v1(96.52,87.503) 96.52,84.201 97.663,83.058 v1(99.187,83.058) ; v1(103.505,82.042) 105.029,82.042 106.299,83.312 106.299,92.71 ; v1(104.267,91.694) 105.283,91.694 106.299,92.71 ; 106.934,116.967 106.172,116.205 v1(106.172,102.997) v1(106.172,97.028) 106.299,96.901 106.299,92.71
  Bottom Layer w0.381: v1(83.82,57.785) 83.82,50.419 v1(84.455,49.784) ; v1(130.556,106.045) 127,102.489 127,93.726 132.588,88.138 v1(132.588,76.454)
  Bottom Layer w0.508: v1@71.501,64.643 71.755,64.389 71.755,44.45 72.136,44.069 v1(73.152,44.069) ; v1(88.519,45.72) v1(88.519,47.625) ; v1(96.52,49.657) 95.818,48.955 v1(95.818,47.939) 101.152,47.939 v1(106.934,53.721)
  Bottom Layer w1: v1(84.709,116.967) 106.934,116.967 v1(136.398,116.967) 141.605,116.967 150.368,108.204 150.368,74.168 155.067,69.469 155.067,62.23 150.368,57.531 v1(150.368,39.497)
+5V: J1.18 J2.2 R5.1 R6.1 R27.2 TP2.1 | length 169.3
  Top Layer w0.254: R5.1@83.947,66.77 R5.1
  Top Layer w0.635: R27.2 72.39,114.554 v1(72.517,114.554) ; v1(80.391,68.961) 80.391,66.897 R6.1 R5.1@83.947,66.77 ; R5.1 87.916,70.739 88.646,70.739 v1(88.649,70.742) ; J2.2 138.303,62.357 v1(143.002,62.357)
  Bottom Layer w0.635: v1(72.517,114.554) 90.932,114.554 92.075,113.411 92.075,84.201 88.649,80.775 v1(88.649,70.742) 97.809,61.582 104.937,61.582 110.258,56.261 144.399,56.261 145.669,57.531 145.669,60.96 144.272,62.357 v1(143.002,62.357) ; J1.18 74.676,59.69 74.676,60.198 74.93,60.452 79.502,60.452 80.391,61.341 v1(80.391,68.961)
CB_RESET#: J2.16 R4.2 | length 96.1
  Top Layer w0.305: v1(98.679,38.735) R4.2 ; J2.16 136.906,70.993 137.668,71.755 146.05,71.755 148.971,68.834 148.971,40.767 146.939,38.735 v1(141.605,38.735)
  Bottom Layer w0.305: v1(98.679,38.735) v1(141.605,38.735)
DDC_SCL: J1.15 R5.2 U1.28 | length 33.8
  Top Layer w0.254: v1(83.058,59.69) 83.058,61.881 R5.2 ; v1(87.884,48.895) 92.583,48.895 93.492,49.804 U1.28
  Bottom Layer w0.254: J1.15 77.359,57.496 79.375,59.512 83.007,59.512 83.058,59.563 v1(83.058,59.69) 85.09,59.69 87.884,56.896 v1(87.884,48.895)
DDC_SDA: J1.16 R6.2 U1.29 | length 39.4
  Top Layer w0.254: J1.16 74.533,58.055 73.914,58.674 73.914,59.69 74.676,60.452 79.883,60.452 80.264,60.833 ; R6.2@81.026,62.008 R6.2 80.264,60.833 ; v1(81.534,60.325) 80.772,60.325 80.264,60.833 ; v1(93.472,48.387) 93.992,48.907 U1.29
  Bottom Layer w0.254: v1(81.534,60.325) 81.712,60.503 84.785,60.503 88.265,57.023 88.265,49.784 89.916,48.133 93.218,48.133 v1(93.472,48.387)
DDI0_AUX_N: J2.14 R2.2 R11.2 R25.2 | length 102.8
  Top Layer w0.254: v1(96.139,68.199) 96.241,68.097 R2.2 ; v1(96.901,74.549) 110.109,74.549 110.363,74.295 110.363,73.914 110.49,73.787 110.744,73.787 110.871,73.914 110.871,74.295 110.998,74.422 128.725,74.422 R25.2 130.725,68.792 132.207,67.31 J2.14 ; v1(97.663,114.808) 99.393,114.808 R11.2
  Bottom Layer w0.254: v1(96.139,68.199) 96.139,73.787 v1(96.901,74.549) 98.07,75.718 98.07,75.898 97.856,76.113 97.856,76.292 98.035,76.472 98.215,76.472 98.824,75.863 99.003,75.863 99.183,76.042 99.183,76.222 98.879,76.527 98.574,76.831 98.574,77.011 98.754,77.19 98.933,77.19 99.148,76.976 99.328,76.976 100.838,78.486 100.838,97.917 97.663,101.092 v1(97.663,114.808)
DDI0_AUX_P: J2.13 R3.2 R9.2 R24.2 | length 103.1
  Top Layer w0.254: R3.2 92.964,71.247 94.234,72.517 v1@94.361,72.644 ; v1(94.361,72.39) v1@94.361,72.644 ; R9.2@94.742,114.427 R9.2 95.631,114.046 v1(96.393,114.046) ; J2.13 129.54,66.04 126.873,68.707 R24.2 v1@94.393,72.676 ; v1@94.361,72.644 94.361,72.708 v1@94.393,72.676 ; v1@94.361,72.644 v1@94.393,72.676
  Bottom Layer w0.254: v1(94.361,72.39) 94.361,73.787 100,79.426 100,97.231 96.393,100.838 v1(96.393,114.046)
DDI0_AUX_SEL: J2.15 R23.1 | length 27.6
  Top Layer w0.254: R23.1 120.697,78.279 121.158,78.74 133.731,78.74 134.493,77.978 134.493,68.961 134.874,68.58 J2.15
DDI0_HPD: J2.12 R1.2 R12.2 | length 95
  Top Layer w0.254: R1.2 99.518,68.53 101.473,70.485 123.825,70.485 129.54,64.77 J2.12
  Top Layer w0.305: R1.2 101.168,65.989 v1(101.219,66.04) ; v1(102.108,107.95) 102.108,112.744 R12.2
  Bottom Layer w0.305: v1(101.219,66.04) 102.108,66.929 v1(102.108,107.95)
DDI0_PAIR0_N: C8.2 C18.2 J2.5 | length 95.4
  Top Layer w0.254: C18.2 v1(140.83,89.167) ; C8.2 119.533,58.039 133.096,58.039 133.731,57.404 v1(135.001,57.404) ; J2.5 143.764,66.04 145.415,64.389 145.415,59.309 v1(143.51,57.404)
  Bottom Layer w0.254: v1(135.001,57.404) v1(143.51,57.404) ; J2.5 140.97,66.04 143.51,68.58 143.51,86.487 v1(140.83,89.167)
DDI0_PAIR0_P: C7.2 C17.2 J2.4 | length 95.4
  Top Layer w0.254: C17.2 v1(139.908,91.885) ; C7.2 132.258,60.02 v1(133.223,59.055) ; J2.4 143.002,64.77 144.399,63.373 144.399,60.706 142.748,59.055 v1(141.986,59.055)
  Bottom Layer w0.254: v1(133.223,59.055) v1(141.986,59.055) ; J2.4 141.496,64.77 144.408,67.682 144.408,87.385 143.692,88.101 143.513,88.101 143.472,88.061 143.293,88.061 143.113,88.24 143.113,88.42 143.153,88.46 143.153,88.64 v1(139.908,91.885)
DDI0_PAIR1_N: C10.2 C16.2 J2.7 | length 101.3
  Top Layer w0.254: C16.2 v1(132.068,94.603) ; C10.2 131.191,51.866 132.348,53.023 v1(135.191,53.023) ; J2.7 144.78,68.58 146.939,66.421 146.939,55.245 144.78,53.086 v1(141.986,53.086)
  Bottom Layer w0.254: v1(132.068,94.603) 132.08,94.615 141.732,84.963 141.732,75.946 141.605,75.819 141.582,75.819 141.455,75.692 141.455,75.438 141.582,75.311 141.605,75.311 141.732,75.184 141.732,69.342 140.97,68.58 J2.7 ; v1(135.191,53.023) 135.255,53.086 v1(141.986,53.086)
DDI0_PAIR1_P: C9.2 C15.2 J2.6 | length 101.3
  Top Layer w0.254: C15.2 131.17,97.321 v1(131.971,96.52) ; C9.2 119.278,54.102 133.223,54.102 133.985,54.864 v1(135.382,54.864) ; J2.6 144.399,67.31 146.304,65.405 146.304,57.15 144.145,54.991 v1(141.986,54.991)
  Bottom Layer w0.254: v1(131.971,96.52) 142.63,85.861 142.63,68.444 141.496,67.31 J2.6 ; v1(135.382,54.864) 135.509,54.991 v1(141.986,54.991)
DDI0_PAIR2_N: C12.2 C14.2 J2.9 | length 107.4
  Top Layer w0.254: C14.2 133.133,100.039 v1(135.382,97.79) ; C12.2 132.79,46.43 136.906,50.546 J2.9
  Bottom Layer w0.254: v1(135.382,97.79) 144.713,88.459 144.713,85.344 144.967,85.09 144.967,84.836 144.713,84.582 144.713,83.947 144.84,83.82 144.967,83.82 145.094,83.693 145.094,83.439 144.967,83.312 144.84,83.312 144.713,83.185 144.713,82.931 144.84,82.804 144.967,82.804 145.094,82.677 145.094,82.423 144.967,82.296 144.84,82.296 144.713,82.169 144.713,81.915 144.84,81.788 144.967,81.788 145.094,81.661 145.094,81.407 144.967,81.28 144.84,81.28 144.713,81.153 144.713,80.899 144.84,80.772 144.967,80.772 145.094,80.645 145.094,80.391 144.967,80.264 144.84,80.264 144.713,80.137 144.713,79.883 144.84,79.756 144.967,79.756 145.094,79.629 145.094,79.375 144.967,79.248 144.84,79.248 144.713,79.121 144.713,78.867 144.84,78.74 144.967,78.74 145.094,78.613 145.094,78.359 144.967,78.232 144.84,78.232 144.713,78.105 144.713,77.851 144.84,77.724 144.967,77.724 145.094,77.597 145.094,77.343 144.967,77.216 144.84,77.216 144.713,77.089 144.713,76.835 144.84,76.708 144.967,76.708 145.094,76.581 145.094,76.327 144.967,76.2 144.84,76.2 144.713,76.073 144.713,75.819 144.84,75.692 144.967,75.692 145.094,75.565 145.094,75.311 144.967,75.184 144.84,75.184 144.713,75.057 144.713,74.93 144.84,74.803 144.967,74.803 145.094,74.676 145.094,74.422 144.967,74.295 144.84,74.295 144.713,74.168 144.713,73.914 144.84,73.787 144.967,73.787 145.094,73.66 145.094,73.406 144.967,73.279 144.84,73.279 144.713,73.152 144.713,72.898 144.84,72.771 144.967,72.771 145.094,72.644 145.094,72.39 144.967,72.263 144.84,72.263 144.713,72.136 144.713,71.882 144.84,71.755 144.967,71.755 145.094,71.628 145.094,71.374 144.967,71.247 144.84,71.247 144.713,71.12 144.713,70.866 144.84,70.739 144.967,70.739 145.094,70.612 145.094,70.358 144.967,70.231 144.84,70.231 144.713,70.104 144.713,69.85 144.84,69.723 144.967,69.723 145.094,69.596 145.094,69.342 144.967,69.215 144.84,69.215 144.713,69.088 144.713,68.834 144.84,68.707 144.967,68.707 145.094,68.58 145.094,68.326 144.967,68.199 144.84,68.199 144.713,68.072 144.713,67.556 140.081,62.924 140.081,60.579 139.065,59.563 137.287,59.563 136.906,59.944 J2.9
DDI0_PAIR2_P: C11.2 C13.2 J2.8 | length 106.7
  Top Layer w0.254: C13.2 128.308,102.832 v1(129.159,101.981) ; C11.2 v1(132.206,49.148) ; J2.8 145.161,69.85 147.828,67.183 147.828,52.959 v1(146.05,51.181)
  Bottom Layer w0.254: v1(129.159,101.981) 129.159,93.599 138.176,84.582 J2.8 ; v1(132.206,49.148) 132.382,48.971 143.967,48.971 146.05,51.054 v1(146.05,51.181)
DDI0_PAIR3_N: C6.2 C20.2 J2.11 | length 55.5
  Top Layer w0.254: C20.2 118.199,83.528 v1(118.237,83.566) ; C6.2 123.444,62.738 124.206,63.5 J2.11
  Bottom Layer w0.254: v1(118.237,83.566) 118.237,72.771 127.508,63.5 J2.11
DDI0_PAIR3_P: C5.2 C19.2 J2.10 | length 54.7
  Top Layer w0.254: C19.2 115.176,86.373 v1(116.713,84.836) ; C5.2 118.847,65.405 v1(123.317,65.405) ; v1(126.238,62.23) J2.10
  Bottom Layer w0.254: v1(116.713,84.836) 116.713,76.708 116.586,76.581 116.459,76.581 116.332,76.454 116.332,76.2 116.459,76.073 116.967,76.073 117.094,75.946 117.094,75.692 116.967,75.565 116.459,75.565 116.332,75.438 116.332,75.184 116.459,75.057 116.967,75.057 117.094,74.93 117.094,74.676 116.967,74.549 116.459,74.549 116.332,74.422 116.332,74.168 116.459,74.041 116.586,74.041 116.713,73.914 116.713,72.009 117.467,71.255 117.647,71.255 117.736,71.345 117.916,71.345 118.096,71.165 118.096,70.986 117.916,70.806 117.736,70.626 117.736,70.447 117.916,70.267 118.096,70.267 118.275,70.447 118.455,70.626 118.635,70.626 118.814,70.447 118.814,70.267 118.455,69.908 118.455,69.728 118.635,69.549 118.814,69.549 118.994,69.728 119.173,69.908 119.353,69.908 119.533,69.728 119.533,69.549 119.173,69.189 119.173,69.01 119.353,68.83 119.533,68.83 119.712,69.01 119.892,69.189 120.071,69.189 120.251,69.01 120.251,68.83 120.071,68.651 119.892,68.471 119.892,68.291 120.071,68.112 120.251,68.112 120.61,68.471 120.79,68.471 120.969,68.291 120.969,68.112 120.79,67.932 120.61,67.753 120.61,67.573 120.79,67.393 120.969,67.393 121.149,67.573 121.329,67.753 121.508,67.753 121.688,67.573 121.688,67.393 121.329,67.034 121.329,66.855 121.508,66.675 121.688,66.675 121.778,66.765 121.957,66.765 v1(123.317,65.405) 126.238,62.484 v1(126.238,62.23)
GND: C1.1 C2.1 C3.1 C4.1 C22.2 J1.2 J1.5 J1.8 J1.11 J1.17 J1.H1 J1.H2 J1.H3 J1.H4 J2.3 J3.2 J3.5 J3.8 J3.11 J3.17 J3.H1 J3.H2 J3.H3 J3.H4 pad.2 pad.3 pad.4 pad.5 pad.6 pad.7 pad.9 pad.10 pad.11 pad.12 pad.13 pad.14 Q1.2 Q2.2 R8.2 R10.2 R13.1 R15.2 R16.1 R26.2 TP3.1 U1.1 U1.5 U1.12 U1.18 U1.24 U1.25 U1.27 U1.31 U1.36 U1.37 U1.43 U1.49 U2.1 U2.5 U2.12 U2.18 U2.24 U2.25 U2.27 U2.31 U2.37 U2.43 U2.49 | length 581.4
  Top Layer w0.254: J1.H2 74.295,63.575 74.295,73.279 75.311,74.295 82.804,74.295 83.932,73.167 Q1.2 ; J3.H1@75.565,85.603 93.558,85.603 C22.2 94.071,86.451 95.976,88.356 U2.31 pad.7 ; J1.11 76.705,55.496 77.216,56.007 pad.2 ; J1.17 77.902,58.496 78.74,57.658 pad.2 ; Q2.2 87.676,72.898 88.773,72.898 90.043,71.628 90.043,67.183 88.849,65.989 R8.2 ; U1.24 U1.49@91.992,53.003 ; U1.25 U1.49@91.992,53.003 ; U1.12 91.992,58.503 U1.49@94.492,56.003 ; U2.24 93.013,90.727 ; U2.18 95.503,93.727 U2.49 ; U2.25 92.976,90.69 93.013,90.727 ; U2.12 92.976,96.254 pad.3 95.734,93.517 U2.49 ; U1.27 U1.49@92.992,54.003 ; 93.599,46.101 94.992,47.494 U1.31 U1.49@94.992,55.503 ; U2.27 U2.49@93.976,91.69 ; v1(94.615,38.989) 95.123,38.989 95.377,39.243 C4.1 ; U1.5 U1.49@95.492,56.503 ; U2.5 U2.49@96.476,94.19 ; U1.36 U1.49@97.492,53.003 ; U1.1 97.492,58.503 U1.49@95.492,56.503 ; U1.37 U1.49@97.492,53.003 ; U1.43 U1.49@94.992,56.003 ; U2.1 98.476,96.19 pad.5 U2.49@96.476,94.19 ; U2.37 98.503,90.727 pad.4 pad.7 ; U2.43 U2.49@96.013,93.727 ; 109.347,118.364 109.363,118.348 R10.2 113.995,115.062 R13.1 ; pad.2 79.807,54.94 84.277,54.94 85.34,56.003 U1.18 U1.49@94.492,56.003 ; U1.49@91.992,53.003 U1.49@92.992,54.003 ; U1.49@92.992,54.003 U1.49 ; 93.013,90.727 U2.49@93.976,91.69 ; U2.49@93.976,91.69 pad.6 U2.49 ; U1.49@94.492,56.003 U1.49 ; U1.49 U1.49@94.992,56.003 ; U1.49 U1.49@94.992,55.503 ; U1.49@94.992,55.503 U1.49@97.492,53.003 ; U1.49@94.992,56.003 U1.49@95.492,56.503 ; U2.49 pad.7 ; pad.7 95.991,93.454 U2.49@96.013,93.727 ; U2.49@96.013,93.727 U2.49@96.476,94.19
  Top Layer w0.305: J3.8 73.692,91.916 73.025,91.249 73.025,88.9 74.168,87.757 77.343,87.757 78.232,88.646 78.232,89.875 77.75,90.357 J3.5
  Top Layer w0.508: J1.H4 J1.H2 ; J1.2 75.311,48.059 J1.H1 ; J1.8 70.913,54.055 69.85,52.992 J1.H3 J1.H1 ; J1.5 77.552,52.496 78.105,51.943 78.105,48.387 77.523,47.805 J1.H1 ; Q1.2 86.299,73.167 Q2.2
  Top Layer w0.635: J3.H4 J3.H3 J3.H1 ; v1(78.867,93.599) v1(80.391,95.123) ; R26.2 v1(81.915,111.481) ; v1(82.423,38.608) 82.423,40.818 C1.1 ; v1(86.741,38.862) C2.1 ; 89.281,118.364 89.471,118.173 R15.2 ; C3.1 91.186,40.818 v1(91.186,38.735) ; 128.143,118.364 128.27,118.237 R16.1 ; J2.3 140.208,63.5 140.716,64.008 142.494,64.008 v1(142.621,63.881)
  Top Layer w1: R26.2 80.62,117.069 81.915,118.364 89.281,118.364 109.347,118.364 128.143,118.364 148.336,118.364 151.511,115.189 TP3.1
  Bottom Layer w0.305: J3.17 J3.17@76.174,96.294
  Bottom Layer w0.508: J3.17@76.174,96.294 78.26,96.294 78.74,96.774
  Bottom Layer w0.635: J3.H4 J3.H2 ; J3.2 75.311,85.92 J3.H1 ; J3.H2@75.565,100.103 J3.H2@77.089,100.103 ; J3.5 76.174,90.294 77.635,90.294 78.867,91.526 v1(78.867,93.599) 78.562,93.294 76.174,93.294 J3.11 ; v1(80.391,95.123) 78.74,96.774 78.74,98.452 J3.H2@77.089,100.103 ; v1(81.915,111.481) 81.915,101.854 80.164,100.103 J3.H2@77.089,100.103 ; v1(93.345,45.72) 93.345,39.624 93.98,38.989 v1(94.615,38.989)
  Bottom Layer w1: J1.H4 J1.H3 69.85,40.767 73.279,37.338 83.693,37.338 ; v1(82.423,38.608) 83.693,37.338 ; v1(86.741,38.862) 88.265,37.338 ; v1(91.186,38.735) 92.583,37.338 ; v1(94.615,38.989) 96.266,37.338 ; v1(142.621,63.881) 148.132,63.881 148.59,64.339 ; TP3.1 148.59,64.339 ; 83.693,37.338 88.265,37.338 ; 88.265,37.338 92.583,37.338 ; 92.583,37.338 96.266,37.338 ; 96.266,37.338 143.51,37.338 148.59,42.418 148.59,64.339
HDMI_HPD: Q1.3 R20.2 R21.2 U1.30 | length 78.1
  Top Layer w0.254: R21.2 R20.2 ; Q1.3 R20.2 ; U1.30 94.488,52.066 94.488,47.879 93.142,46.533 68.783,46.533 67.945,47.371 67.945,52.324 70.358,54.737 72.009,54.737 73.025,55.753 73.025,60.071 73.914,60.96 77.343,60.96 77.978,61.595 77.978,62.611 77.089,63.5 75.565,63.5 74.93,64.135 74.93,72.009 75.438,72.517 R20.2
HDMI_HPD_OUT: J1.19 Q2.1 R8.1 R20.1 | length 48.7
  Top Layer w0.254: R20.1 73.203,74.727 73.787,75.311 87.757,75.311 88.153,74.915 Q2.1 89.093,73.721 91.059,71.755 91.059,64.897 88.951,62.789 R8.1 87.503,60.071 86.233,58.801 76.918,58.801 76.223,59.496 J1.19
NetC5_1: C5.1 U1.48 | length 19.8
  Top Layer w0.254: U1.48 104.731,58.503 111.684,65.456 C5.1
NetC6_1: C6.1 U1.47 | length 18.9
  Top Layer w0.254: U1.47 104.993,58.003 109.728,62.738 C6.1
NetC7_1: C7.1 U1.45 | length 18.2
  Top Layer w0.254: U1.45 98.456,56.972 110.947,56.972 113.995,60.02 C7.1
NetC8_1: C8.1 U1.44 | length 17.3
  Top Layer w0.254: U1.44 111.24,56.503 112.039,57.302 C8.1
NetC9_1: C9.1 U1.42 | length 17.3
  Top Layer w0.254: U1.42 110.994,55.503 111.913,54.584 C9.1
NetC10_1: C10.1 U1.41 | length 18.3
  Top Layer w0.254: U1.41 110.732,55.003 113.869,51.866 C10.1
NetC11_1: C11.1 U1.39 | length 19
  Top Layer w0.254: U1.39 104.747,54.003 109.602,49.148 C11.1
NetC12_1: C12.1 U1.38 | length 19.9
  Top Layer w0.254: U1.38 104.231,53.503 111.304,46.43 C12.1
NetC13_1: C13.1 U2.48 | length 14.7
  Top Layer w0.254: U2.48 102.577,96.227 109.182,102.832 C13.1
NetC14_1: C14.1 U2.47 | length 13.7
  Top Layer w0.254: U2.47 102.966,95.727 107.278,100.039 C14.1
NetC15_1: C15.1 U2.45 | length 13
  Top Layer w0.254: U2.45 105.903,94.727 108.497,97.321 C15.1
NetC16_1: C16.1 U2.44 | length 12.1
  Top Layer w0.254: U2.44 107.054,94.227 107.43,94.603 C16.1
NetC17_1: C17.1 U2.42 | length 12.5
  Top Layer w0.254: U2.42 105.02,93.227 106.362,91.885 C17.1
NetC18_1: C18.1 U2.41 | length 13.4
  Top Layer w0.254: U2.41 104.631,92.727 108.191,89.167 C18.1
NetC19_1: C19.1 U2.39 | length 14.1
  Top Layer w0.254: U2.39 102.329,91.727 107.683,86.373 C19.1
NetC20_1: C20.1 U2.38 | length 15.1
  Top Layer w0.254: U2.38 101.94,91.227 109.639,83.528 C20.1
NetC21_1: C21.1 U2.36 | length 6.9
  Top Layer w0.254: U2.36 98.476,89.23 99.187,88.519 100.711,88.519 101.125,88.105 C21.1
NetC21_2: C21.2 U2.35 | length 5.3
  Top Layer w0.254: U2.35 97.976,89.095 98.679,88.392 98.679,85.344 C21.2
NetC22_1: C22.1 J3.18 R29.1 U2.34 | length 64.5
  Top Layer w0.254: R29.1 75.057,102.489 75.565,101.981 77.343,101.981 77.851,101.473 77.851,99.06 77.47,98.679 75.819,98.679 75.311,98.171 J3.18 ; v2(86.868,80.772) 95.377,80.772 96.771,82.166 C22.1 ; C22.1@96.901,85.09 96.901,86.36 97.476,86.935 U2.34
  Bottom Layer w0.254: J3.18@75.311,96.853 73.231,96.853 71.501,95.123 71.501,83.566 74.295,80.772 v2(86.868,80.772)
NetJ3_1: J3.1 U2.13 | length 22.9
  Top Layer w0.254: v1(88.646,97.536) 89.916,97.536 91.225,96.227 U2.13
  Bottom Layer w0.254: J3.1 76.174,88.294 77.635,88.294 77.987,88.646 83.185,88.646 86.792,92.253 86.792,97.079 87.249,97.536 88.177,97.536
NetJ3_3: J3.3 U2.14 | length 23.1
  Top Layer w0.254: v1(85.979,97.028) 87.255,97.028 88.017,96.266 90.489,96.266 91.028,95.727 U2.14
  Bottom Layer w0.254: J3.3 76.174,89.294 77.838,89.294 78.105,89.027 83.058,89.027 85.979,91.948 v1(85.979,97.028)
NetJ3_4: J3.4 U2.16 | length 31.4
  Top Layer w0.254: v1(88.773,94.615) 88.773,94.742 88.788,94.727 89.394,94.727 89.402,94.735 92.243,94.735 U2.16
  Bottom Layer w0.254: J3.4 74.041,89.916 73.66,89.535 73.66,84.963 75.311,83.312 79.121,83.312 87.503,91.694 87.503,93.345 v1(88.773,94.615)
NetJ3_6: J3.6 U2.17 | length 33.4
  Top Layer w0.254: v1(89.916,93.98) 89.916,94.093 90.05,94.227 U2.17
  Bottom Layer w0.254: J3.6 73.644,90.916 73.152,90.424 73.152,84.836 75.184,82.804 79.502,82.804 88.138,91.44 88.138,92.583 89.535,93.98 v1(89.916,93.98)
NetJ3_7: J3.7 U2.19 | length 16.9
  Top Layer w0.254: J3.7 81.572,91.357 83.441,93.227 U2.19
NetJ3_9: J3.9 U2.20 | length 20.7
  Top Layer w0.254: J3.9 81.125,92.357 v1(81.153,92.329) 77.67,92.329 ; v1(83.82,91.948) 84.599,92.727 U2.20
  Bottom Layer w0.254: 81.534,91.948 v1(81.153,92.329) 83.439,92.329 v1(83.82,91.948)
NetJ3_10: J3.10 U2.22 | length 36.1
  Top Layer w0.254: v1(88.773,90.573) 89.926,91.727 U2.22
  Bottom Layer w0.254: J3.10@75.311,92.964 73.279,92.964 72.644,92.329 72.644,84.455 74.93,82.169 81.788,82.169 88.773,89.154 v1(88.773,90.573)
NetJ3_12: J3.12 U2.23 | length 38.6
  Top Layer w0.254: v1(90.297,90.424) 91.1,91.227 U2.23
  Bottom Layer w0.254: J3.12@75.311,93.98 72.898,93.98 72.136,93.218 72.136,83.947 74.676,81.407 82.296,81.407 90.246,89.357 90.246,90.373 v1(90.297,90.424)
NetJ3_15: J3.15 R30.2 U2.28 | length 39.8
  Top Layer w0.254: J3.15 78.593,95.357 80.01,96.774 R30.2 R30.2@80.01,105.791 ; v1(80.01,90.043) 80.01,88.646 80.645,88.011 87.376,88.011 88.138,87.249 92.583,87.249 94.476,89.142 U2.28
  Bottom Layer w0.254: J3.15 78.379,95.357 80.01,93.726 v1(80.01,90.043)
NetJ3_16: J3.16 R28.2 U2.29 | length 47.4
  Top Layer w0.254: R28.2 72.612,105.442 73.279,104.775 73.279,96.52 73.883,95.916 ; J3.16 73.883,95.916 ; U2.29 94.976,88.9 92.817,86.741 87.757,86.741 87.249,87.249 73.533,87.249 72.136,88.646 72.136,94.169 73.883,95.916
NetJ3_19: J3.19 R26.1 U2.30 | length 60.4
  Top Layer w0.254: v1(72.39,97.663) 70.612,95.885 70.612,89.281 73.152,86.741 86.995,86.741 87.503,86.233 93.218,86.233 95.476,88.491 U2.30 ; J3.19 78.688,97.357 79.121,97.79 v1(79.121,101.854) ; v1(77.419,110.693) R26.1
  Bottom Layer w0.254: v1(72.39,97.663) 75.805,97.663 J3.19 ; v1(77.419,110.693) 77.419,105.08 79.121,103.378 v1(79.121,101.854)
NetQ1_1: Q1.1 Q2.3 R22.2 | length 17.2
  Top Layer w0.254: R22.2 77.253,64.934 77.597,65.278 77.597,70.739 78.725,71.867 Q1.1 87.457,71.867 Q2.3
NetR1_1: R1.1 U1.7 | length 7.3
  Top Layer w0.254: U1.7 94.492,60.083 95.75,61.341 98.578,61.341 R1.1@100.026,62.789
NetR2_1: R2.1 U1.8 | length 4.4
  Top Layer w0.254: U1.8 93.992,60.667 R2.1
NetR3_1: R3.1 U1.9 | length 3.5
  Top Layer w0.254: R3.1@93.472,62.916 93.472,59.456 U1.9
NetR4_1: R4.1 R7.1 U1.32 | length 12.5
  Top Layer w0.254: U1.32 95.492,49.415 98.679,46.228 R4.1 R7.1
NetR9_1: R9.1 U2.9 | length 14.6
  Top Layer w0.254: U2.9 94.476,111.468 R9.1@94.564,111.557
NetR10_1: R10.1 U2.6 | length 20.5
  Top Layer w0.254: U2.6 95.976,97.881 109.363,111.268 R10.1
NetR11_1: R11.1 U2.8 | length 16.7
  Top Layer w0.254: U2.8 94.976,103.231 99.52,107.775 R11.1
NetR12_1: R12.1 U2.7 | length 18.4
  Top Layer w0.254: U2.7 95.476,99.54 104.299,108.363 R12.1
NetR13_2: R13.2 R14.2 U2.4 | length 28.7
  Top Layer w0.254: U2.4 96.976,98.069 106.095,107.188 109.677,107.188 R13.2 ; R13.2@114.173,111.455 R14.2
NetR15_1: R15.1 R18.1 U2.10 | length 21.5
  Top Layer w0.254: R18.1 R15.1 89.471,107.759 93.976,103.255 U2.10
NetR16_2: R16.2 R19.2 U2.3 | length 39.2
  Top Layer w0.254: U2.3 97.476,97.73 105.791,106.045 121.666,106.045 123.698,108.077 R19.2
  Top Layer w0.305: R19.2 123.723,111.43 R16.2
NetR27_1: R27.1 R28.1 R29.2 R30.1 | length 13.9
  Top Layer w0.254: R28.1 74.86,109.442 R29.2 ; R27.1 75.057,111.531 R29.2 ; R30.1 79.813,109.245 R29.2
TMDS_CLK_N: J1.12 U1.14 | length 48.3
  Top Layer w0.254: v1(88.011,58.547) 88.138,58.547 88.682,58.003 U1.14
  Bottom Layer w0.254: J1.12 75.232,56.134 73.66,56.134 72.898,56.896 72.898,70.485 73.279,70.866 75.057,70.866 75.184,70.993 75.438,70.993 75.565,70.866 75.565,70.646 75.692,70.519 75.946,70.519 76.073,70.646 76.073,70.866 76.2,70.993 76.454,70.993 76.581,70.866 76.581,70.646 76.708,70.519 76.962,70.519 77.089,70.646 77.089,70.866 77.216,70.993 77.47,70.993 77.597,70.866 77.597,70.646 77.724,70.519 77.978,70.519 78.105,70.646 78.105,70.739 78.232,70.866 86.614,70.866 87.376,70.104 87.376,59.182 v1(88.011,58.547)
TMDS_CLK_P: J1.10 U1.13 | length 48.3
  Top Layer w0.254: v1(88.9,59.563) 89.96,58.503 U1.13
  Bottom Layer w0.254: J1.10 75.232,55.134 73.66,55.134 72.39,56.404 72.39,70.977 72.914,71.501 86.741,71.501 88.011,70.231 88.011,60.071 88.519,59.563 v1(88.9,59.563)
TMDS_D0_N: J1.9 U1.23 | length 17.8
  Top Layer w0.254: J1.9 78.727,54.496 79.451,53.772 79.451,52.629 80.772,51.308 88.138,51.308 90.333,53.503 U1.23
TMDS_D0_P: J1.7 U1.22 | length 17.2
  Top Layer w0.254: J1.7 76.14,53.467 v1(78.486,53.467) ; v1(80.264,53.594) 80.264,53.34 81.661,51.943 82.931,51.943 83.058,52.07 83.058,52.194 83.185,52.321 83.439,52.321 83.566,52.194 83.566,52.07 83.693,51.943 87.998,51.943 90.03,53.975 91.031,53.975 U1.22
  Bottom Layer w0.254: v1(78.486,53.467) 80.137,53.467 v1(80.264,53.594)
TMDS_D1_N: J1.6 U1.20 | length 35.4
  Top Layer w0.254: v1(86.614,53.594) 86.614,53.975 87.642,55.003 U1.20
  Bottom Layer w0.254: J1.6 73.787,53.055 72.517,51.785 72.517,46.609 73.859,45.267 84.383,45.267 86.614,47.498 v1(86.614,53.594)
TMDS_D1_P: J1.4 U1.19 | length 35.4
  Top Layer w0.254: v1(85.471,54.61) 85.725,54.61 86.618,55.503 U1.19
  Bottom Layer w0.254: J1.4 74.041,52.055 73.279,51.293 73.279,46.736 74.041,45.974 75.946,45.974 76.073,46.101 76.073,46.228 76.2,46.355 76.454,46.355 76.581,46.228 76.581,45.902 76.708,45.775 76.962,45.775 77.089,45.902 77.089,46.228 77.216,46.355 77.47,46.355 77.597,46.228 77.597,45.902 77.724,45.775 77.978,45.775 78.105,45.902 78.105,46.228 78.232,46.355 78.486,46.355 78.613,46.228 78.613,45.902 78.74,45.775 78.994,45.775 79.193,45.974 83.566,45.974 85.471,47.879 v1(85.471,54.61)
TMDS_D2_N: J1.3 U1.17 | length 21
  Top Layer w0.254: v1(81.407,55.753) 84.086,55.753 84.836,56.503 U1.17
  Bottom Layer w0.254: J1.3 77.851,51.496 77.978,51.623 77.978,51.75 78.105,51.877 78.359,51.877 78.486,51.75 78.486,51.242 78.613,51.115 78.867,51.115 78.994,51.242 78.994,51.75 79.121,51.877 79.375,51.877 79.502,51.75 79.502,51.623 79.629,51.496 81.026,51.496 81.407,51.877 v1(81.407,55.753)
TMDS_D2_P: J1.1 U1.16 | length 21
  Top Layer w0.254: v1(82.677,57.023) 82.728,56.972 91.028,56.972 U1.16
  Bottom Layer w0.254: J1.1 77.724,50.496 77.851,50.369 77.851,50.242 77.978,50.115 78.232,50.115 78.359,50.242 78.359,50.369 78.486,50.496 81.026,50.496 82.677,52.147 v1(82.677,57.023)
pads on no net: J1.13 J1.14 J3.13 J3.14 U1.3 U1.4 U1.6 U1.10 U1.34 U1.35

## Keep-outs
Keep-Out Layer:
  the board outline again, w0.254

## Other copper
Bottom Layer:
  rectangle net GND: 93.267,90.956 98.298,96.012
  rectangle net GND: 92.048,53.086 97.409,58.447

## Silkscreen, mask and mechanical layers (free items; w line width, h text height)
Top Overlay:
  lines w0.254: 74.295,118.364 74.803,118.364 ; 150.368,60.071 154.305,60.071 ; 151.257,59.436 153.67,59.436 ; 151.892,58.928 153.035,58.928 ; 152.527,58.42 152.654,58.42 ; 74.803,118.364 68.707,118.364 68.199,117.856 68.199,111.506 68.707,110.998 71.628,110.998 71.628,102.743 71.882,102.489 76.454,102.489 76.708,102.743 76.708,110.871 76.073,110.871 75.692,111.252 75.692,117.475 74.803,118.364 ; 67.31,71.12 67.564,70.866 78.359,70.866 78.486,70.993 78.486,75.184 67.31,75.184 67.31,71.12 ; 82.423,110.236 82.423,119.507 92.583,119.507 92.71,119.38 92.71,110.236 82.423,110.236 ; 85.979,61.214 85.979,69.85 89.535,69.85 89.662,69.977 89.662,61.214 85.979,61.214 ; 97.028,39.243 97.028,47.939 98.238,49.149 104.267,49.149 104.902,48.514 104.902,39.243 103.759,38.1 98.171,38.1 97.028,39.243 ; 112.395,109.347 112.395,119.507 121.158,119.507 121.285,119.38 121.285,109.601 121.031,109.347 112.395,109.347 ; 121.793,109.601 121.793,119.38 131.445,119.38 131.445,109.474 121.92,109.474 121.793,109.601
  text "HDMI Level Shifter / 1917 / V1I1 / GNU License" at 132.588,100.965 h1.52
  text "DnE AB" at 132.842,98.933 h1.52
  text "CB_RESET#  PAIR2_P / AUX_SEL      PAIR1_N / AUX_N          PAIR1_P / AUX_P           PAIR0_N / HPD               PAIR0_P / PAIR3_N        GND / PAIR3_P         +5V / PAIR2_N        +3V" at 133.096,71.628 h1.2
  text "GND" at 150.368,61.087 h1.52
  text "+5V" at 128.27,50.292 h1.52
  text "+3V3" at 137.922,44.704 h1.52

## Text inside footprints (layer, text, board x,y; h text height)
J2: Top Overlay "1" at 138.811,59.474 h1.27 r90; Top Overlay "9" at 137.16,58.928 h1.27 r90; Top Overlay "8" at 139.573,70.866 h1.27 r90; Top Overlay "16" at 137.541,70.993 h1.27 r90; Mechanical 13 "1" at 138.811,59.436 h1.27 r90; Mechanical 13 "9" at 137.16,58.928 h1.27 r90; Mechanical 13 "8" at 139.573,70.866 h1.27 r90; Mechanical 13 "16" at 137.541,70.993 h1.27 r90
U1: Mechanical 13 "*" at 97.107,59.118 h1.27 r270